# Altium PCB Infrared reception V2.0.PcbDoc
Units mil, origin at the board's own origin, x right, y up, seen from the top; angles counter-clockwise.
Board outline 2394.23 x 2394.23 mil, 2 copper layers (Top Layer, Bottom Layer); 49 components, 31 nets, 124 pads, 33 vias.
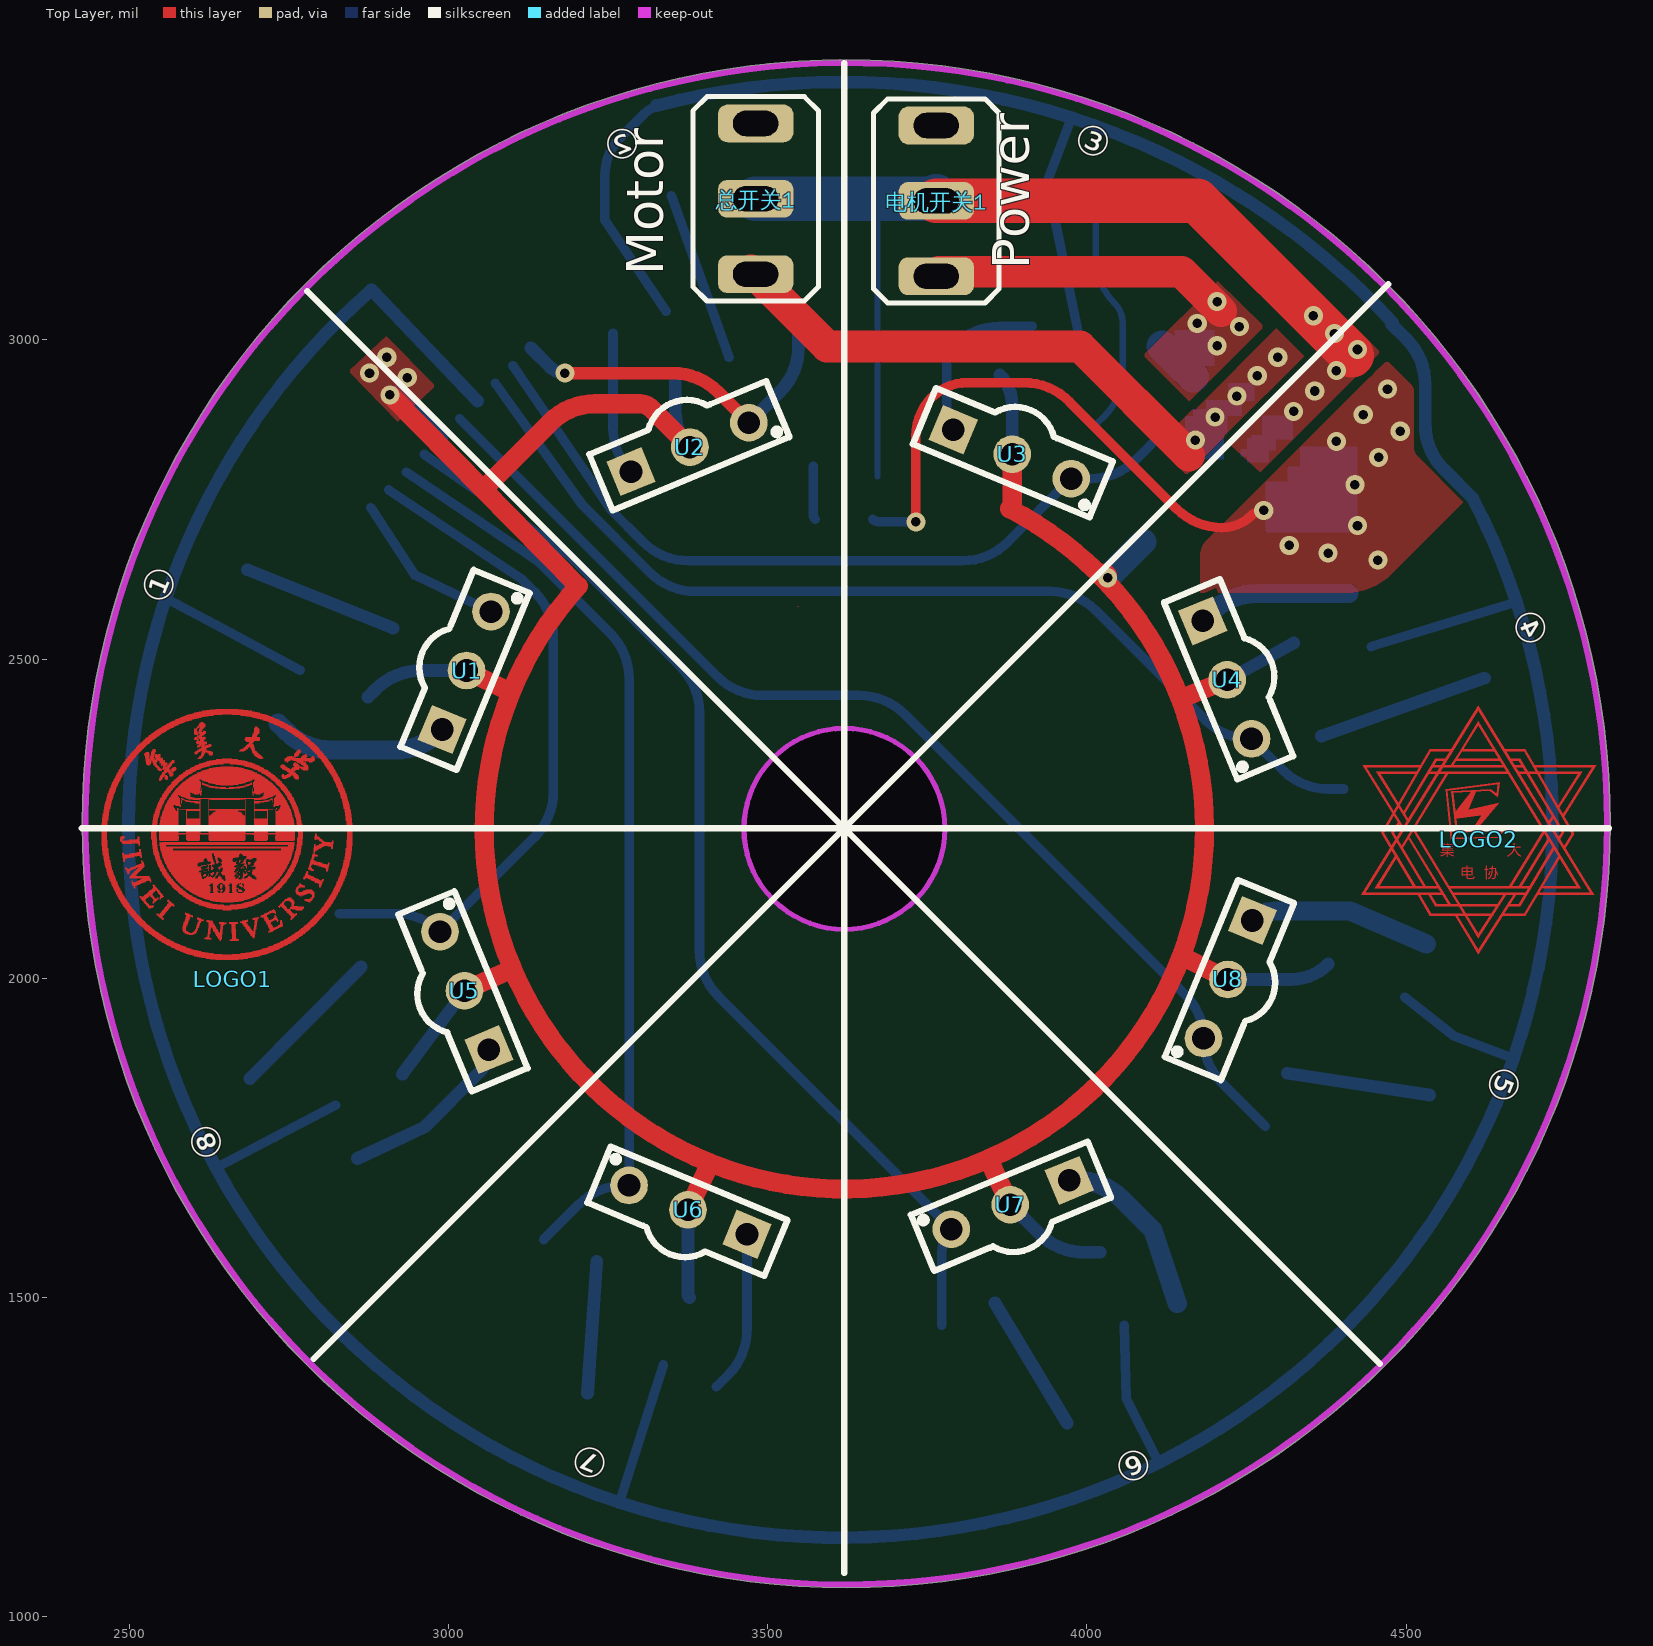
[diagram p0: Top Layer view]
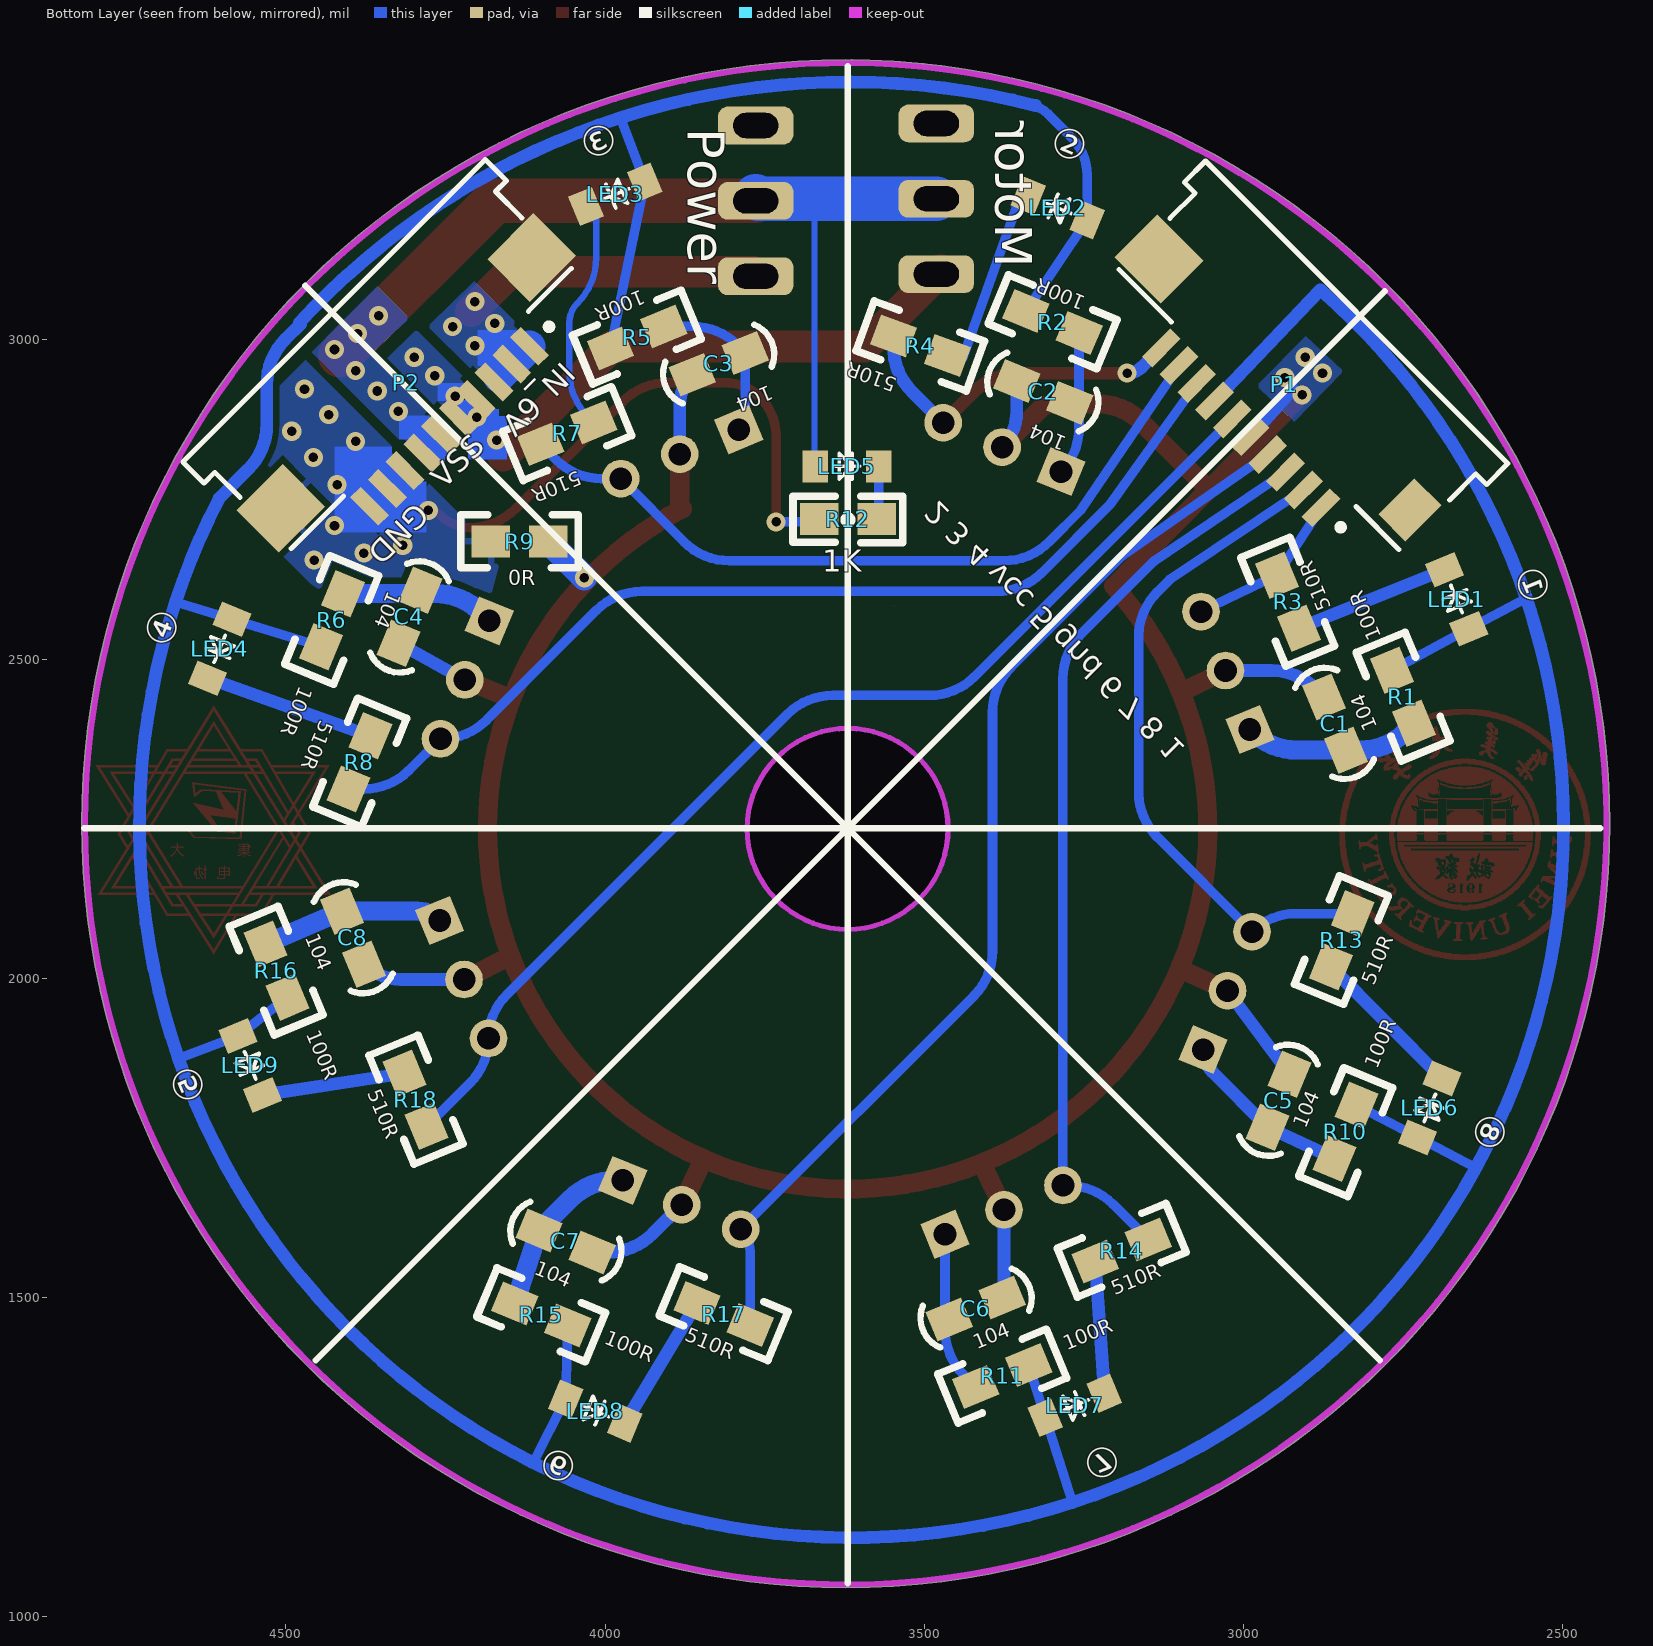
[diagram p1: Bottom Layer view, seen from below]
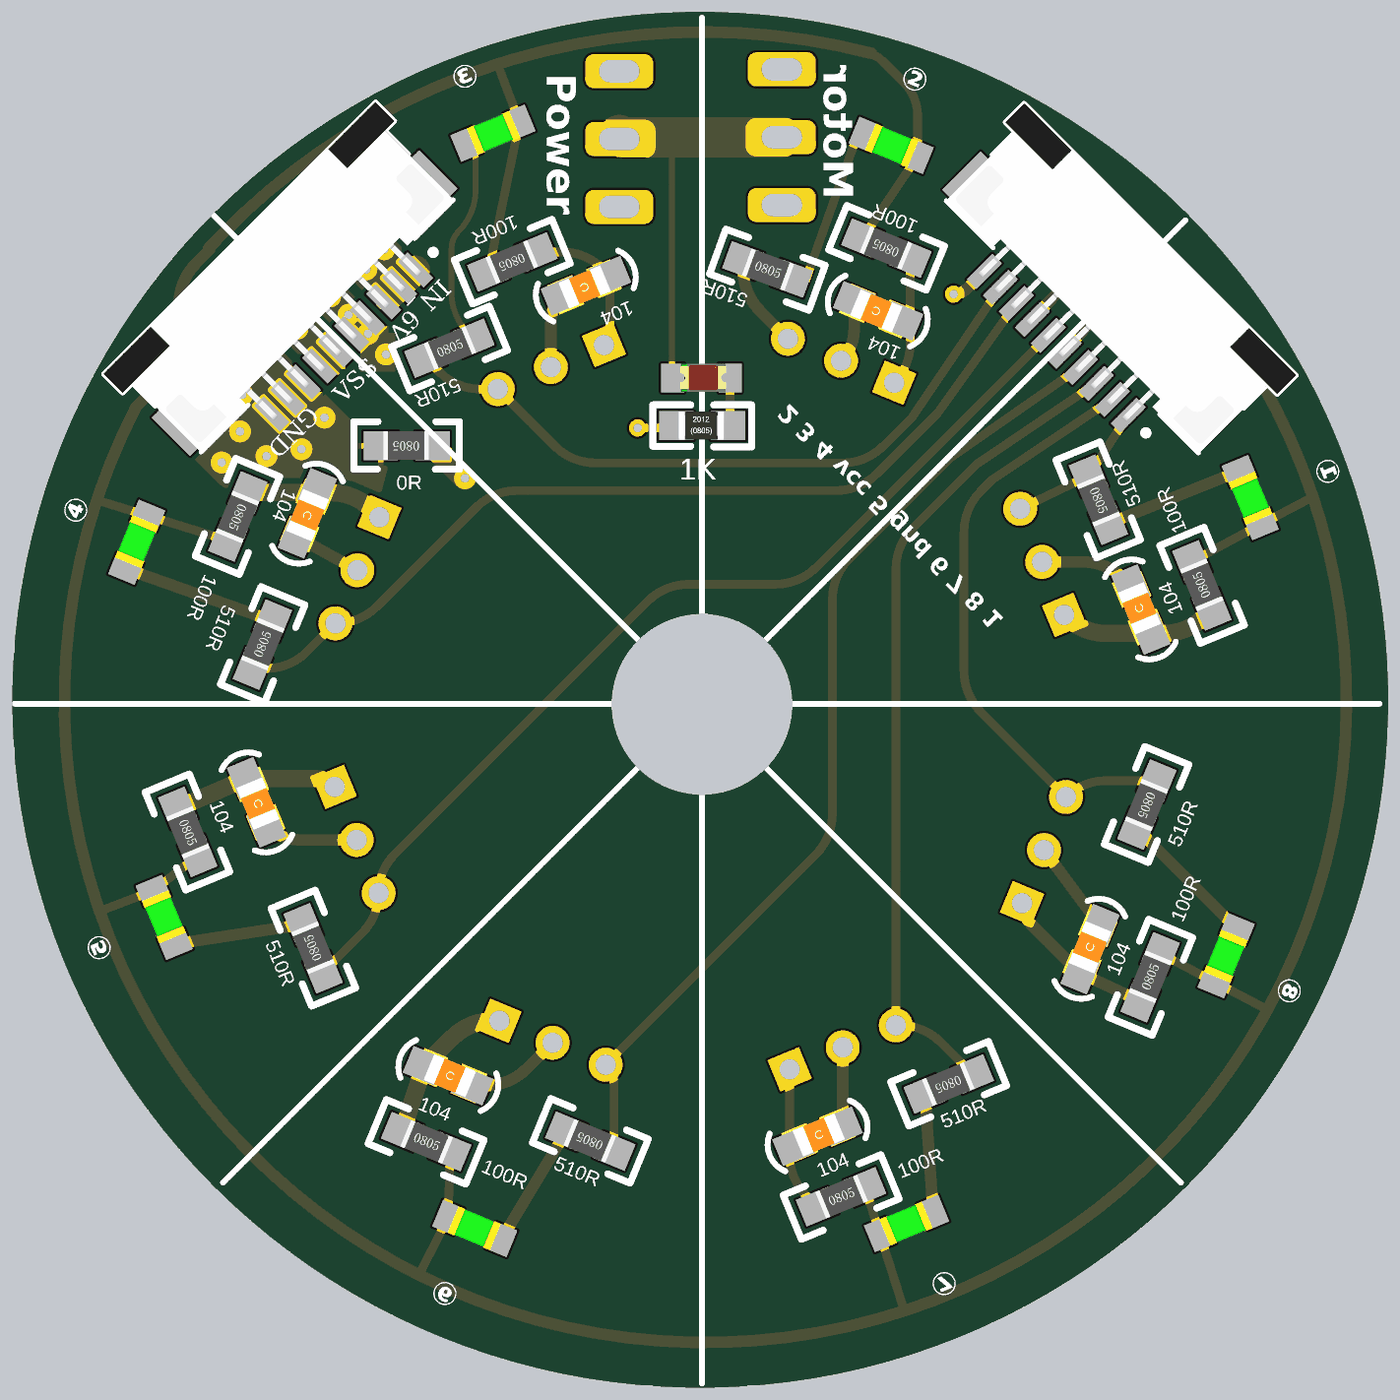
[diagram p2: 3D render of the assembled board from below, using the file's embedded part models]

## Layer stack, top to bottom
Top Solder: solder mask 0.4, Solder Resist, Dk 3.5
Top Layer: signal copper 1.4
Dielectric 1: dielectric 12.6, FR-4, Dk 4.8
Bottom Layer: signal copper 1.4
Bottom Solder: solder mask 0.4, Solder Resist, Dk 3.5

## Board outline
2425.89,2242 ccw(c3623,2242) 3623,1044.89 ccw(c3623,2242) 4820.11,2242 ccw(c3623,2242) 3623,3439.11 ccw(c3623,2242)
cut-out: 3462.52,2234 ccw(c3620,2234) 3620,2076.52 ccw(c3620,2234) 3777.48,2234 ccw(c3620,2234) 3620,2391.48 ccw(c3620,2234)

## Design rules (kind name [scope] priority, off if disabled: settings)
Clearance [All] p1: gap=10
DiffPairsRouting [All] p1: maxlimit=10 minlimit=10 mostfreqgap=10 toplayer_minwidth=0 toplayer_maxwidth=15 toplayer_prefwidth=15 bottomlayer_minwidth=15 bottomlayer_maxwidth=15 bottomlayer_prefwidth=15 maxuncoupledlength=500
PolygonConnect [All] p1: connectstyle=Relief reliefconductorwidth=10 reliefentries=4 polygonreliefangle="90 Angle" airgapwidth=10
RoutingVias [All] p1: holewidth=28 width=50 viastyle="Through Hole" minholewidth=28 minwidth=50 maxholewidth=28 maxwidth=50
SolderMaskExpansion [All] p1: expansion=4
Width [All] p1: maxlimit=100 minlimit=10 preferedwidth=10 minimp=50.000000 maximp=50.000000 favimp=50.000000
29 further rules are at their usual default settings.

## Components (designator, comment, footprint, x,y, rotation, side; value= is the part's Value field where it differs from the comment)
C1 "104" 0805C 2841,2362 r67.5 bottom
C2 "104" 0805C 3276.47,2903.47 r22.5 bottom
C3 "104" 0805C 3785,2978 r337.5 bottom
C4 "104" 0805C 4291.47,2603.53 r292.5 bottom
C5 "104" 0805C 2960,1771 r112.5 bottom
C6 "104" 0805C 3456,1467 r157.5 bottom
C7 "104" 0805C 4099,1603 r202.5 bottom
C8 "104" 0805C 4410.53,2100.53 r247.5 bottom
LED1 "LED" 0805LED 2649.34,2548.69 r67.5 bottom
LED2 "LED" 0805LED 3247.23,3186.65 r22.5 bottom
LED3 "LED" 0805LED 3938.69,3244.66 r337.5 bottom
LED4 "LED" 0805LED 4583.65,2559.78 r292.5 bottom
LED5 "LED2" LED(0805) 3621,2802 r180 bottom
LED6 "LED" 0805LED 2728,1753 r112.5 bottom
LED7 "LED" 0805LED 3309,1314 r157.5 bottom
LED8 "LED" 0805LED 4059,1342 r202.5 bottom
LED9 "LED" 0805LED 4572.66,1908.31 r247.5 bottom
LOGO1 "JMU_LOGO" JMU_logo（1） 2662,1998 r0 top
LOGO2 "电协LOGO" 电协LOGO 4614,2216.9 r0 top
P1 "FPC-10" FPC-10#1 2958.17,2907.64 r45 bottom
P2 "FPC-10" FPC-10#2 4289,2910 r315 bottom
R1 "100R" 0805R#1 2750,2441 r67.5 bottom
R2 "100R" 0805R#1 3299,3028 r22.5 bottom
R3 "510R" 0805R#1 2930,2590 r247.5 bottom
R4 "510R" 0805R#1 3506,2991 r200 bottom
R5 "100R" 0805R#1 3950,3004 r337.5 bottom
R6 "100R" 0805R#1 4428,2561 r292.5 bottom
R7 "510R" 0805R#1 4059.57,2853.78 r157.5 bottom
R8 "510R" 0805R#1 4385,2338 r112.5 bottom
R9 "0R" 0805R#1 4134,2684 r0 bottom
R10 "100R" 0805R#1 2840,1759 r112.5 bottom
R11 "100R" 0805R#1 3378,1377 r157.5 bottom
R12 "1K" 0805R#2 3660,2718 r180 bottom
R13 "510R" 0805R#1 2845.78,2059.57 r292.5 bottom
R14 "510R" 0805R#1 3190.43,1573.22 r337.5 bottom
R15 "100R" 0805R#1 4100,1473 r202.5 bottom
R16 "100R" 0805R#1 4515,2012 r247.5 bottom
R17 "510R" 0805R#1 3814.43,1473.78 r22.5 bottom
R18 "510R" 0805R#1 4296.78,1809.43 r67.5 bottom
U1 "HS0038/VS1838" HS0038 3028,2482 r67.5 top
U2 "HS0038/VS1838" HS0038 3378,2832 r22.5 top
U3 "HS0038/VS1838" HS0038 3883,2821 r337.5 top
U4 "HS0038/VS1838" HS0038 4219.73,2467.39 r292.5 top
U5 "HS0038/VS1838" HS0038 3024.73,1980.39 r112.5 top
U6 "HS0038/VS1838" HS0038 3375,1637 r157.5 top
U7 "HS0038/VS1838" HS0038 3880,1645 r202.5 top
U8 "HS0038/VS1838" HS0038 4221,1998 r247.5 top
总开关1 "Header 3" 钮子开关(小) 3481,3221.11 r90 top
电机开关1 "Header 3" 钮子开关(小) 3764,3217.89 r90 top

## Footprints (in the part's own frame and the unit in brackets; to place one, negate y for a bottom-side part, rotate by r counter-clockwise, add the part's x,y. Pads: shape width x height; smd on the part's side, far side on the other; paste and mask are expansions set on the pad)
0805C [mil]
  rect 60x50 smd: 1(-5,0) 2(85,0)
  silkscreen extent -50,-35 131,36, body extent -16,-26 102,29, height 37
0805LED [mil]
  rect 40x50 smd: 1(-2,-2) 2(98,-2)
  silkscreen extent 25,-22 71,18, body extent 7,-27 87,23, height 43
0805R#1 [mil]
  rect 60x50 smd: 1(-45,0) 2(45,0)
  silkscreen extent -92,-42 92,41, body extent -38,-25 40,25, height 22
0805R#2 [mil]
  rect 60x50 smd: 1(-4.51,1.2) 2(85.49,1.2)
  silkscreen extent -46,-36 126,37, body extent -1,-23 78,26, height 18
FPC-10#1 [mm]
  rect 1.524x2.032 smd: 0(-7.061,-0.813)
  rect 2.6x2.4 smd: 0(7.061,-0.813)
  rect 0.6x1.6 smd: 1(-4.5,1.625) 2(-3.5,1.625) 3(-2.5,1.625) 4(-1.5,1.625) 5(-0.5,1.625) 6(0.5,1.625) 7(1.5,1.625) 8(2.5,1.625) 9(3.5,1.625) 10(4.5,1.625)
  silkscreen extent -8.51,-4.88 8.51,1.75, body extent -8.5,-4.89 8.5,1.91, height 2.8
FPC-10#2 [mm]
  rect 2.6x2.4 smd: 0(-7.061,-0.813) 0(7.061,-0.813)
  rect 0.6x1.6 smd: 1(-4.5,1.625) 2(-3.5,1.625) 3(-2.5,1.625) 4(-1.5,1.625) 5(-0.5,1.625) 6(0.5,1.625) 7(1.5,1.625) 8(2.5,1.625) 9(3.5,1.625) 10(4.5,1.625)
  silkscreen extent -8.51,-4.88 8.51,1.75, body extent -8.5,-4.89 8.5,1.91, height 2.8
HS0038 [mm]
  round 1.5 hole 0.9: 1(2.54,0) 2(0,0)
  rect 1.5x1.5 hole 0.9: 3(-2.54,0)
  silkscreen extent -3.81,-1.14 3.81,1.9
JMU_logo（1） [mil]
  Top Layer region: 8.21,175.64 7.21,175.64 7.21,176.64 8.21,176.64
  Top Layer region: 27.21,181.64 26.21,181.64 26.21,180.64 24.21,180.64 24.21,183.64 27.21,183.64
  Top Layer region: -42.79,162.64 -43.79,162.64 -43.79,161.64 -46.79,161.64 -46.79,163.64 -44.79,163.64 -44.79,164.64 -42.79,164.64
  Top Layer region: -32.79,175.64 -31.79,175.64 -31.79,174.64 -30.79,174.64 -30.79,173.64 -31.79,173.64 -31.79,172.64 -32.79,172.64 -32.79,171.64 -33.79,171.64 -33.79,176.64 -32.79,176.64
  Top Layer region: -29.79,165.64 -30.79,165.64 -30.79,164.64 -31.79,164.64 -31.79,163.64 -33.79,163.64 -33.79,164.64 -34.79,164.64 -34.79,166.64 -31.79,166.64 -31.79,167.64 -29.79,167.64
  Top Layer region: -103.79,318.64 -101.79,318.64 -101.79,313.64 -102.79,313.64 -102.79,312.64 -104.79,312.64 -104.79,313.64 -105.79,313.64 -105.79,314.64 -106.79,314.64 -106.79,319.64 -103.79,319.64
  Top Layer region: -89.79,330.64 -88.79,330.64 -88.79,329.64 -89.79,329.64 -89.79,327.64 -90.79,327.64 -90.79,326.64 -92.79,326.64 -92.79,325.64 -93.79,325.64 -93.79,324.64 -95.79,324.64 -95.79,325.64 -94.79,325.64 -94.79,327.64 -95.79,327.64 -95.79,326.64 -97.79,326.64 -97.79,328.64 -96.79,328.64 -96.79,329.64 -95.79,329.64 -95.79,330.64 -94.79,330.64 -94.79,331.64 -92.79,331.64 -92.79,332.64 -89.79,332.64
  Top Layer region: -40.79,358.64 -37.79,358.64 -37.79,357.64 -34.79,357.64 -34.79,356.64 -32.79,356.64 -32.79,355.64 -31.79,355.64 -31.79,352.64 -32.79,352.64 -32.79,351.64 -36.79,351.64 -36.79,352.64 -37.79,352.64 -37.79,354.64 -39.79,354.64 -39.79,355.64 -41.79,355.64 -41.79,356.64 -42.79,356.64 -42.79,358.64 -41.79,358.64 -41.79,359.64 -40.79,359.64
  Top Layer region: 105.21,357.64 106.21,357.64 106.21,355.64 105.21,355.64 105.21,354.64 104.21,354.64 104.21,353.64 103.21,353.64 103.21,351.64 102.21,351.64 102.21,350.64 101.21,350.64 101.21,349.64 99.21,349.64 99.21,348.64 97.21,348.64 97.21,349.64 96.21,349.64 96.21,352.64 97.21,352.64 97.21,354.64 98.21,354.64 98.21,355.64 99.21,355.64 99.21,356.64 100.21,356.64 100.21,357.64 101.21,357.64 101.21,359.64 105.21,359.64
  Top Layer region: 7.21,87.64 4.21,87.64 4.21,86.64 3.21,86.64 3.21,78.64 4.21,78.64 4.21,64.64 5.21,64.64 5.21,62.64 9.21,62.64 9.21,61.64 8.21,61.64 8.21,60.64 -4.79,60.64 -4.79,61.64 -3.79,61.64 -3.79,62.64 -0.79,62.64 -0.79,72.64 -1.79,72.64 -1.79,86.64 -3.79,86.64 -3.79,87.64 -5.79,87.64 -5.79,89.64 7.21,89.64
  Top Layer region: -100.79,123.64 -99.79,123.64 -99.79,122.64 -98.79,122.64 -98.79,121.64 -97.79,121.64 -97.79,120.64 -96.79,120.64 -96.79,119.64 -94.79,119.64 -94.79,118.64 -93.79,118.64 -93.79,117.64 -92.79,117.64 -92.79,116.64 -91.79,116.64 -91.79,114.64 -93.79,114.64 -93.79,115.64 -96.79,115.64 -96.79,114.64 -97.79,114.64 -97.79,113.64 -98.79,113.64 -98.79,112.64 -99.79,112.64 -99.79,111.64 -100.79,111.64 -100.79,109.64 -101.79,109.64 -101.79,108.64 -102.79,108.64 -102.79,107.64 -103.79,107.64 -103.79,106.64 -104.79,106.64 -104.79,105.64 -105.79,105.64 -105.79,103.64 -106.79,103.64 -106.79,102.64 -107.79,102.64 -107.79,101.64 -108.79,101.64 -108.79,100.64 -109.79,100.64 -109.79,98.64 -110.79,98.64 -110.79,96.64 -109.79,96.64 -109.79,95.64 -108.79,95.64 -108.79,94.64 -109.79,94.64 -109.79,93.64 -110.79,93.64 -110.79,94.64 -111.79,94.64 -111.79,95.64 -112.79,95.64 -112.79,96.64 -113.79,96.64 -113.79,97.64 -115.79,97.64 -115.79,98.64 -116.79,98.64 -116.79,99.64 -117.79,99.64 -117.79,100.64 -118.79,100.64 -118.79,101.64 -119.79,101.64 -119.79,102.64 -116.79,102.64 -116.79,101.64 -114.79,101.64 -114.79,102.64 -113.79,102.64 -113.79,103.64 -112.79,103.64 -112.79,104.64 -111.79,104.64 -111.79,106.64 -110.79,106.64 -110.79,107.64 -109.79,107.64 -109.79,108.64 -108.79,108.64 -108.79,109.64 -107.79,109.64 -107.79,111.64 -106.79,111.64 -106.79,112.64 -105.79,112.64 -105.79,113.64 -104.79,113.64 -104.79,114.64 -103.79,114.64 -103.79,115.64 -102.79,115.64 -102.79,117.64 -101.79,117.64 -101.79,118.64 -100.79,118.64 -100.79,121.64 -101.79,121.64 -101.79,122.64 -102.79,122.64 -102.79,123.64 -101.79,123.64 -101.79,124.64 -100.79,124.64
  Top Layer region: -144.79,199.64 -143.79,199.64 -143.79,194.64 -142.79,194.64 -142.79,190.64 -144.79,190.64 -144.79,192.64 -145.79,192.64 -145.79,193.64 -150.79,193.64 -150.79,192.64 -155.79,192.64 -155.79,191.64 -160.79,191.64 -160.79,190.64 -165.79,190.64 -165.79,189.64 -168.79,189.64 -168.79,188.64 -169.79,188.64 -169.79,184.64 -170.79,184.64 -170.79,185.64 -171.79,185.64 -171.79,190.64 -172.79,190.64 -172.79,195.64 -173.79,195.64 -173.79,197.64 -172.79,197.64 -172.79,198.64 -171.79,198.64 -171.79,196.64 -170.79,196.64 -170.79,195.64 -169.79,195.64 -169.79,194.64 -168.79,194.64 -168.79,195.64 -162.79,195.64 -162.79,196.64 -158.79,196.64 -158.79,197.64 -152.79,197.64 -152.79,198.64 -148.79,198.64 -148.79,199.64 -146.79,199.64 -146.79,203.64 -144.79,203.64
  Top Layer region: 117.21,168.64 118.21,168.64 118.21,167.64 117.21,167.64 117.21,164.64 118.21,164.64 118.21,163.64 120.21,163.64 120.21,162.64 122.21,162.64 122.21,161.64 124.21,161.64 124.21,160.64 126.21,160.64 126.21,159.64 128.21,159.64 128.21,158.64 130.21,158.64 130.21,157.64 132.21,157.64 132.21,156.64 134.21,156.64 134.21,155.64 136.21,155.64 136.21,154.64 139.21,154.64 139.21,155.64 140.21,155.64 140.21,156.64 142.21,156.64 142.21,155.64 141.21,155.64 141.21,153.64 140.21,153.64 140.21,150.64 139.21,150.64 139.21,148.64 138.21,148.64 138.21,146.64 137.21,146.64 137.21,144.64 135.21,144.64 135.21,149.64 134.21,149.64 134.21,150.64 132.21,150.64 132.21,151.64 129.21,151.64 129.21,152.64 128.21,152.64 128.21,153.64 126.21,153.64 126.21,154.64 124.21,154.64 124.21,155.64 122.21,155.64 122.21,156.64 120.21,156.64 120.21,157.64 118.21,157.64 118.21,158.64 116.21,158.64 116.21,159.64 114.21,159.64 114.21,158.64 113.21,158.64 113.21,157.64 112.21,157.64 112.21,156.64 111.21,156.64 111.21,157.64 110.21,157.64 110.21,158.64 111.21,158.64 111.21,160.64 112.21,160.64 112.21,162.64 113.21,162.64 113.21,164.64 114.21,164.64 114.21,166.64 115.21,166.64 115.21,168.64 116.21,168.64 116.21,169.64 117.21,169.64
  Top Layer region: -170.79,223.64 -169.79,223.64 -169.79,221.64 -170.79,221.64 -170.79,220.64 -171.79,220.64 -171.79,219.64 -173.79,219.64 -173.79,217.64 -162.79,217.64 -162.79,218.64 -150.79,218.64 -150.79,219.64 -148.79,219.64 -148.79,223.64 -146.79,223.64 -146.79,216.64 -145.79,216.64 -145.79,210.64 -146.79,210.64 -146.79,209.64 -147.79,209.64 -147.79,212.64 -148.79,212.64 -148.79,213.64 -158.79,213.64 -158.79,212.64 -172.79,212.64 -172.79,213.64 -173.79,213.64 -173.79,214.64 -174.79,214.64 -174.79,215.64 -175.79,215.64 -175.79,217.64 -176.79,217.64 -176.79,221.64 -175.79,221.64 -175.79,223.64 -174.79,223.64 -174.79,224.64 -170.79,224.64
  Top Layer region: 128.21,195.64 131.21,195.64 131.21,194.64 133.21,194.64 133.21,192.64 127.21,192.64 127.21,190.64 126.21,190.64 126.21,188.64 125.21,188.64 125.21,186.64 126.21,186.64 126.21,185.64 129.21,185.64 129.21,184.64 132.21,184.64 132.21,183.64 136.21,183.64 136.21,182.64 139.21,182.64 139.21,181.64 142.21,181.64 142.21,180.64 145.21,180.64 145.21,179.64 148.21,179.64 148.21,180.64 149.21,180.64 149.21,182.64 151.21,182.64 151.21,179.64 150.21,179.64 150.21,176.64 149.21,176.64 149.21,172.64 148.21,172.64 148.21,169.64 146.21,169.64 146.21,173.64 145.21,173.64 145.21,174.64 143.21,174.64 143.21,175.64 140.21,175.64 140.21,176.64 137.21,176.64 137.21,177.64 134.21,177.64 134.21,178.64 130.21,178.64 130.21,179.64 127.21,179.64 127.21,180.64 124.21,180.64 124.21,181.64 123.21,181.64 123.21,178.64 122.21,178.64 122.21,174.64 123.21,174.64 123.21,172.64 125.21,172.64 125.21,171.64 126.21,171.64 126.21,170.64 122.21,170.64 122.21,171.64 119.21,171.64 119.21,172.64 118.21,172.64 118.21,174.64 119.21,174.64 119.21,178.64 120.21,178.64 120.21,181.64 121.21,181.64 121.21,184.64 122.21,184.64 122.21,187.64 123.21,187.64 123.21,190.64 124.21,190.64 124.21,194.64 125.21,194.64 125.21,196.64 128.21,196.64
  Top Layer region: 40.21,95.64 39.21,95.64 39.21,94.64 38.21,94.64 38.21,90.64 37.21,90.64 37.21,84.64 36.21,84.64 36.21,78.64 35.21,78.64 35.21,73.64 34.21,73.64 34.21,72.64 35.21,72.64 35.21,71.64 34.21,71.64 34.21,66.64 33.21,66.64 33.21,64.64 32.21,64.64 32.21,65.64 31.21,65.64 31.21,66.64 30.21,66.64 30.21,67.64 29.21,67.64 29.21,68.64 28.21,68.64 28.21,70.64 27.21,70.64 27.21,71.64 26.21,71.64 26.21,72.64 25.21,72.64 25.21,74.64 24.21,74.64 24.21,75.64 23.21,75.64 23.21,76.64 22.21,76.64 22.21,78.64 21.21,78.64 21.21,79.64 20.21,79.64 20.21,81.64 19.21,81.64 19.21,82.64 18.21,82.64 18.21,83.64 17.21,83.64 17.21,85.64 16.21,85.64 16.21,86.64 15.21,86.64 15.21,87.64 14.21,87.64 14.21,88.64 11.21,88.64 11.21,90.64 14.21,90.64 14.21,91.64 18.21,91.64 18.21,92.64 22.21,92.64 22.21,93.64 23.21,93.64 23.21,90.64 20.21,90.64 20.21,89.64 21.21,89.64 21.21,87.64 22.21,87.64 22.21,85.64 23.21,85.64 23.21,84.64 24.21,84.64 24.21,83.64 25.21,83.64 25.21,81.64 26.21,81.64 26.21,80.64 27.21,80.64 27.21,79.64 28.21,79.64 28.21,77.64 29.21,77.64 29.21,76.64 30.21,76.64 30.21,75.64 31.21,75.64 31.21,74.64 32.21,74.64 32.21,79.64 33.21,79.64 33.21,84.64 34.21,84.64 34.21,91.64 35.21,91.64 35.21,93.64 31.21,93.64 31.21,95.64 34.21,95.64 34.21,96.64 39.21,96.64 39.21,97.64 40.21,97.64
  Top Layer region: 106.21,148.64 108.21,148.64 108.21,147.64 110.21,147.64 110.21,146.64 112.21,146.64 112.21,144.64 104.21,144.64 104.21,143.64 103.21,143.64 103.21,142.64 102.21,142.64 102.21,141.64 101.21,141.64 101.21,138.64 102.21,138.64 102.21,137.64 103.21,137.64 103.21,136.64 108.21,136.64 108.21,137.64 110.21,137.64 110.21,138.64 112.21,138.64 112.21,139.64 115.21,139.64 115.21,140.64 123.21,140.64 123.21,139.64 124.21,139.64 124.21,138.64 125.21,138.64 125.21,137.64 126.21,137.64 126.21,136.64 127.21,136.64 127.21,128.64 126.21,128.64 126.21,127.64 125.21,127.64 125.21,125.64 124.21,125.64 124.21,124.64 123.21,124.64 123.21,123.64 121.21,123.64 121.21,120.64 119.21,120.64 119.21,121.64 117.21,121.64 117.21,122.64 115.21,122.64 115.21,123.64 112.21,123.64 112.21,125.64 120.21,125.64 120.21,126.64 122.21,126.64 122.21,127.64 123.21,127.64 123.21,128.64 124.21,128.64 124.21,132.64 123.21,132.64 123.21,134.64 120.21,134.64 120.21,135.64 118.21,135.64 118.21,134.64 115.21,134.64 115.21,133.64 113.21,133.64 113.21,132.64 111.21,132.64 111.21,131.64 107.21,131.64 107.21,130.64 105.21,130.64 105.21,131.64 102.21,131.64 102.21,132.64 101.21,132.64 101.21,133.64 100.21,133.64 100.21,134.64 99.21,134.64 99.21,136.64 98.21,136.64 98.21,140.64 99.21,140.64 99.21,142.64 100.21,142.64 100.21,144.64 101.21,144.64 101.21,145.64 102.21,145.64 102.21,146.64 104.21,146.64 104.21,149.64 106.21,149.64
  Top Layer region: 130.21,227.64 131.21,227.64 131.21,224.64 132.21,224.64 132.21,223.64 134.21,223.64 134.21,222.64 135.21,222.64 135.21,221.64 136.21,221.64 136.21,220.64 137.21,220.64 137.21,219.64 139.21,219.64 139.21,218.64 140.21,218.64 140.21,217.64 141.21,217.64 141.21,216.64 142.21,216.64 142.21,215.64 144.21,215.64 144.21,214.64 152.21,214.64 152.21,213.64 154.21,213.64 154.21,214.64 155.21,214.64 155.21,217.64 157.21,217.64 157.21,212.64 156.21,212.64 156.21,204.64 154.21,204.64 154.21,207.64 153.21,207.64 153.21,208.64 148.21,208.64 148.21,209.64 143.21,209.64 143.21,208.64 141.21,208.64 141.21,207.64 139.21,207.64 139.21,206.64 137.21,206.64 137.21,205.64 135.21,205.64 135.21,204.64 134.21,204.64 134.21,203.64 132.21,203.64 132.21,202.64 130.21,202.64 130.21,201.64 129.21,201.64 129.21,200.64 128.21,200.64 128.21,198.64 126.21,198.64 126.21,206.64 127.21,206.64 127.21,211.64 129.21,211.64 129.21,208.64 131.21,208.64 131.21,209.64 133.21,209.64 133.21,210.64 135.21,210.64 135.21,211.64 137.21,211.64 137.21,212.64 139.21,212.64 139.21,213.64 140.21,213.64 140.21,214.64 139.21,214.64 139.21,215.64 138.21,215.64 138.21,216.64 136.21,216.64 136.21,217.64 135.21,217.64 135.21,218.64 134.21,218.64 134.21,219.64 132.21,219.64 132.21,220.64 130.21,220.64 130.21,218.64 128.21,218.64 128.21,224.64 129.21,224.64 129.21,228.64 130.21,228.64
  Top Layer region: -73.79,103.64 -71.79,103.64 -71.79,102.64 -68.79,102.64 -68.79,101.64 -66.79,101.64 -66.79,100.64 -63.79,100.64 -63.79,99.64 -62.79,99.64 -62.79,97.64 -64.79,97.64 -64.79,98.64 -66.79,98.64 -66.79,97.64 -67.79,97.64 -67.79,95.64 -68.79,95.64 -68.79,92.64 -69.79,92.64 -69.79,89.64 -70.79,89.64 -70.79,87.64 -71.79,87.64 -71.79,84.64 -72.79,84.64 -72.79,81.64 -73.79,81.64 -73.79,76.64 -72.79,76.64 -72.79,75.64 -71.79,75.64 -71.79,74.64 -70.79,74.64 -70.79,73.64 -68.79,73.64 -68.79,72.64 -62.79,72.64 -62.79,73.64 -61.79,73.64 -61.79,74.64 -60.79,74.64 -60.79,75.64 -59.79,75.64 -59.79,76.64 -58.79,76.64 -58.79,78.64 -57.79,78.64 -57.79,81.64 -56.79,81.64 -56.79,84.64 -55.79,84.64 -55.79,86.64 -54.79,86.64 -54.79,89.64 -53.79,89.64 -53.79,93.64 -54.79,93.64 -54.79,94.64 -55.79,94.64 -55.79,96.64 -53.79,96.64 -53.79,95.64 -50.79,95.64 -50.79,94.64 -48.79,94.64 -48.79,93.64 -45.79,93.64 -45.79,91.64 -49.79,91.64 -49.79,90.64 -50.79,90.64 -50.79,88.64 -51.79,88.64 -51.79,86.64 -52.79,86.64 -52.79,83.64 -53.79,83.64 -53.79,80.64 -54.79,80.64 -54.79,78.64 -55.79,78.64 -55.79,76.64 -56.79,76.64 -56.79,74.64 -57.79,74.64 -57.79,72.64 -59.79,72.64 -59.79,71.64 -60.79,71.64 -60.79,70.64 -62.79,70.64 -62.79,69.64 -68.79,69.64 -68.79,70.64 -71.79,70.64 -71.79,71.64 -73.79,71.64 -73.79,72.64 -75.79,72.64 -75.79,73.64 -76.79,73.64 -76.79,74.64 -77.79,74.64 -77.79,76.64 -78.79,76.64 -78.79,83.64 -77.79,83.64 -77.79,86.64 -76.79,86.64 -76.79,89.64 -75.79,89.64 -75.79,91.64 -74.79,91.64 -74.79,94.64 -73.79,94.64 -73.79,97.64 -72.79,97.64 -72.79,101.64 -74.79,101.64 -74.79,104.64 -73.79,104.64
  Top Layer region: 215 vertices and 0 holes, not listed, extent -145.79,111.64 -108.79,148.64
  Top Layer region: 177 vertices and 0 holes, not listed, extent 43.21,73.64 78.21,109.64
  Top Layer region: -37.79,91.64 -32.79,91.64 -32.79,90.64 -31.79,90.64 -31.79,88.64 -30.79,88.64 -30.79,86.64 -29.79,86.64 -29.79,85.64 -28.79,85.64 -28.79,83.64 -27.79,83.64 -27.79,82.64 -26.79,82.64 -26.79,80.64 -25.79,80.64 -25.79,78.64 -24.79,78.64 -24.79,77.64 -23.79,77.64 -23.79,75.64 -22.79,75.64 -22.79,73.64 -21.79,73.64 -21.79,72.64 -20.79,72.64 -20.79,70.64 -19.79,70.64 -19.79,78.64 -18.79,78.64 -18.79,87.64 -21.79,87.64 -21.79,89.64 -14.79,89.64 -14.79,88.64 -10.79,88.64 -10.79,87.64 -11.79,87.64 -11.79,86.64 -14.79,86.64 -14.79,84.64 -15.79,84.64 -15.79,78.64 -16.79,78.64 -16.79,70.64 -17.79,70.64 -17.79,62.64 -18.79,62.64 -18.79,60.64 -20.79,60.64 -20.79,62.64 -21.79,62.64 -21.79,63.64 -22.79,63.64 -22.79,65.64 -23.79,65.64 -23.79,66.64 -24.79,66.64 -24.79,68.64 -25.79,68.64 -25.79,70.64 -26.79,70.64 -26.79,71.64 -27.79,71.64 -27.79,73.64 -28.79,73.64 -28.79,74.64 -29.79,74.64 -29.79,76.64 -30.79,76.64 -30.79,78.64 -31.79,78.64 -31.79,80.64 -32.79,80.64 -32.79,81.64 -33.79,81.64 -33.79,83.64 -34.79,83.64 -34.79,79.64 -35.79,79.64 -35.79,71.64 -36.79,71.64 -36.79,64.64 -33.79,64.64 -33.79,62.64 -41.79,62.64 -41.79,63.64 -44.79,63.64 -44.79,64.64 -43.79,64.64 -43.79,65.64 -40.79,65.64 -40.79,66.64 -39.79,66.64 -39.79,71.64 -38.79,71.64 -38.79,79.64 -37.79,79.64 -37.79,86.64 -36.79,86.64 -36.79,87.64 -37.79,87.64 -37.79,89.64 -39.79,89.64 -39.79,90.64 -40.79,90.64 -40.79,92.64 -37.79,92.64
  Top Layer region: 139 vertices and 1 holes, not listed, extent 71.21,93.64 111.21,127.64
  Top Layer region: 195 vertices and 0 holes, not listed, extent -168.79,142.64 -127.79,185.64
  Top Layer region: 155 vertices and 0 holes, not listed, extent 10.21,345.64 47.21,395.64
  Top Layer region: 241 vertices and 4 holes, not listed, extent -60.79,345.64 -33.79,402.64
  Top Layer region: 219 vertices and 1 holes, not listed, extent -138.79,311.64 -91.79,360.64
  Top Layer region: 251 vertices and 0 holes, not listed, extent 75.21,313.64 128.21,352.64
  Top Layer region: 261 vertices and 22 holes, not listed, extent -114.79,120.64 96.21,214.64
  Top Layer region: 309 vertices and 19 holes, not listed, extent -115.79,217.64 97.21,333.64
  Top Layer region: 557 vertices and 1 holes, not listed, extent -127.79,108.64 109.21,345.64
  Top Layer region: 917 vertices and 1 holes, not listed, extent -205.79,30.64 187.21,423.64
LED(0805) [mil]
  rect 40x50 smd: 1(-50,0) 2(50,0)
  silkscreen extent -20,-20 20,20, body extent -37,-24 43,25, height 43
电协LOGO [mil]
  Top Layer region: 116.9,14.74 122.9,24.74 124.9,22.74 124.9,20.74 119.9,12.74 117.9,12.74
  Top Layer region: 108.9,27.74 114.9,37.74 116.9,35.74 116.9,33.74 111.9,25.74 109.9,25.74
  Top Layer region: 64.9,106.74 160.9,106.74 161.9,106.74 124.9,47.74 123.9,52.74 155.9,103.74 65.9,103.74
  Top Layer region: 86.9,116.74 182.9,116.74 183.9,116.74 133.9,36.74 131.4,39.24 177.9,113.74 87.9,113.74
  Top Layer region: -26.1,141.74 23.9,141.74 24.9,140.74 25.9,139.74 26.9,138.74 -28.1,138.74
  Top Layer region: 75.9,106.74 61.9,106.74 59.9,104.74 62.9,103.74 63.9,103.74 64.9,103.74 75.9,103.74
  Top Layer region: 68.9,116.74 54.9,116.74 52.9,114.74 56.9,114.74 57.9,113.74 68.9,113.74
  Top Layer region: -52.1,126.74 -68.1,126.74 -118.6,43.24 -116.1,40.74 -66.1,123.74 -54.1,123.74
  Top Layer region: -37.1,126.74 32.9,126.74 31.9,126.74 33.9,125.74 33.9,123.74 -39.1,123.74
  Top Layer region: -79.1,103.74 -77.1,106.74 43.9,106.74 45.9,103.74
  Top Layer region: -70.1,116.74 38.9,116.74 38.9,115.74 39.9,113.74 -72.1,113.74
  Top Layer region: 32.9,89.74 29.9,66.74 16.9,76.74 18.9,78.74 27.9,71.74 29.9,86.74 -49.1,76.74 -41.6,3.24 29.9,4.74 40.9,19.74 -35.1,9.74 -43.1,75.74 18.9,78.74 17.9,77.74 16.9,76.74 -40.1,73.74 -33.1,12.74 41.9,22.74 46.9,23.74 30.9,2.74 -44.1,0.74 -52.1,78.74
  Top Layer region: -110.86,2.35 -46.94,-102.76 -43.6,-102.76 -43.98,-101.19 -110.1,6.74
  Top Layer region: -102.86,14.35 -13.1,-133.26 -0.82,-154.09 43.9,-84.26 39.9,-84.26 -0.82,-147.26 -34.1,-92.26 -102.1,18.74
  Top Layer region: -37.1,-119.26 -13.1,-158.26 -0.82,-179.09 59.9,-84.26 55.9,-84.26 -0.82,-172.26 -34.1,-117.26 -37.1,-118.26
  Top Layer region: -74.6,-116.26 -32.6,-116.26 23.4,-116.26 22.4,-119.26 -76.6,-119.26 -96.6,-84.26 -92.6,-85.26
  Top Layer region: -125.1,25.74 -125.72,29.35 -137.1,10.74 -85.56,-75.17 -83.1,-73.26 -133.1,10.74 -122.8,26.44
  Top Layer region: 125.9,-23.26 70.9,-116.26 37.9,-116.26 35.9,-119.26 72.9,-119.26 127.9,-27.26
  Top Layer region: 116.76,-10.47 62.9,-101.26 47.9,-101.26 46.9,-104.26 64.9,-104.26 119.9,-12.26
  Top Layer region: 109.9,3.74 61.9,-74.26 65.9,-75.26 111.9,0.74
  Top Layer region: 101.9,15.74 46.9,-73.76 47.9,-75.26 51.9,-73.26 103.9,12.74
  Top Layer region: -51.1,104.74 -121.6,-10.76 -119.6,-13.76 -47.1,104.74
  Top Layer region: -95.6,106.74 -160.6,106.74 -112.1,28.74 -109.1,29.74 -154.6,103.74 -99.1,103.74
  Top Layer region: -91.1,116.74 -182.1,116.74 -119.1,15.74 -117.1,17.74 -176.1,113.74 -93.1,113.74
  Top Layer region: -43.1,141.74 -77.03,141.74 -153.1,10.74 -101.56,-75.17 -99.1,-73.26 -149.1,10.74 -75.1,138.74 -43.1,138.74
  Top Layer region: 39.9,141.74 72.9,141.74 149.9,9.74 134.9,-15.26 132.9,-11.26 145.9,9.74 70.9,138.74 39.9,138.74
  Top Layer region: -66.1,-101.26 -24.1,-101.26 31.9,-101.26 30.9,-104.26 -68.1,-104.26 -79.1,-85.26 -75.1,-86.26
  Top Layer region: -40.1,-83.26 29.9,-83.26 75.9,-83.26 74.9,-86.26 -40.1,-86.26
  Top Layer region: -46.1,-73.26 23.9,-73.26 79.9,-73.26 78.9,-76.26 -46.1,-76.26
  Top Layer region: 48.9,126.74 64.9,126.74 133.9,11.74 126.9,-0.26 124.9,3.74 129.9,11.74 62.9,123.74 50.9,123.74
  Top Layer region: -44.1,116.74 -30.1,137.74 -1.1,185.74 159.9,-76.26 98.9,-76.26 100.9,-73.26 153.9,-73.26 -1.1,179.74 -40.1,116.74
  Top Layer region: -1.1,209.74 -12.1,192.74 -184.1,-86.26 -176.1,-86.26 -57.1,-86.31 -55.1,-83.26 -61.75,-72.19 -65.1,-73.26 -156.1,-73.26 -129.1,-29.26 -131.1,-25.26 -163.1,-76.26 -63.1,-76.26 -58.6,-83.26 -178.1,-83.26 -1.1,202.74 52.9,114.74 174.9,-83.26 94.9,-83.26 92.9,-86.26 180.9,-86.26 170.9,-70.26
  Top Layer region: -12.1,75.24 -37.85,42.49 -36.1,32.74 4.9,38.74 -11.1,14.74 -5.1,14.74 31.9,57.74 -16.6,46.74 -3.6,76.74
钮子开关(小) [mm]
  rrect50% 1.5x3 hole 1 slot 1.8 at 90 deg: 1(-3,0) 2(0,0) 3(3,0)
  silkscreen extent -4.06,-2.5 4.06,2.5

## Part data
C1 C2 C3 C4 C5 C6 C7 C8: library part Cap1, "无极贴片电容"
LED1 LED2 LED3 LED4 LED6 LED7 LED8 LED9: "发光二极管"
LED5: library part LED, "发光二极管"
LOGO1: "LOGO"
P1 P2: "软排线底座"
R1 R2 R3 R4 R5 R6 R7 R8 R9 R10 R11 R12 R13 R14 R15 R16 R17 R18: library part Res, "电阻"
U1 U2 U3 U4 U5 U6 U7 U8: "一体化红外接收头"
总开关1 电机开关1: "排针"

## Via types
v1: diameter 30, hole 15, Top Layer to Bottom Layer, 33 vias

## Nets (pads, with @x,y where several pads share a name; then routed paths per layer and width w, separated by ;. In a path a pad name is that pad's centre, name@x,y a point inside that pad or via, vN(x,y) a via of type N, cw(c..) or ccw(c..) an arc to the next point about the centre after c; other vN are vias at no path point)
AGND: C1.2 C2.2 C3.2 C4.2 C5.2 C6.2 C7.2 C8.2 P1.5 R9.1 U1.2 U2.2 U3.2 U4.2 U5.2 U6.2 U7.2 U8.2 | length 5566.9
  Top Layer w30: v1(2908,2914) 3054,2765.77 ; U5.2 3099.96,2014.83 ; U1.2 3097.63,2447.56 ; U6.2 3409.72,1710.3 ; U2.2 3317.78,2892.22 ccw(c3299,2873.44) 3299,2900 3229.66,2900 ccw(c3229.66,2800) 3158.94,2870.71 3054,2765.77 ; U7.2 3845.67,1716.75 ; U3.2 3883,2735.47 3878.85,2735.47 cw(c3620,2234) 4017.54,2634.54 cw(c3620,2234) 4069.07,2575.77 cw(c3620,2234) 4146.41,2437.39 ; v1@4029,2635 4032.5,2631.5 v1(4032.5,2627.5) ; U4.2 4146.41,2437.39 ; U8.2 4148.07,2034.97 ; 3054,2765.77 3203.12,2614.37 ccw(c3620,2234) 3097.63,2447.56 ; 3097.63,2447.56 ccw(c3620,2234) 3099.96,2014.83 ; 3099.96,2014.83 ccw(c3620,2234) 3409.72,1710.3 ; 3409.72,1710.3 ccw(c3620,2234) 3845.67,1716.75 ; 3845.67,1716.75 ccw(c3620,2234) 4148.07,2034.97 ; 4146.41,2437.39 cw(c3620,2234) 4148.07,2034.97
  Bottom Layer w20: C1.2 2885.71,2452.71 cw(c2956.42,2382) 2956.42,2482 U1.2 ; 2922.76,2922.21 P1.5 ; C5.2 U5.2 ; C2.2 3355,2887.53 ccw(c3433.53,2887.53) U2.2 ; U6.2 3375,1505.49 ccw(c3383.43,1505.49) C6.2 ; C3.2 cw(c3816.52,2898.47) 3883,2898.47 U3.2 ; U7.2 3925.24,1599.76 ccw(c3995.95,1670.47) 3995.95,1570.47 C7.2 ; v1(4032.5,2627.5) 4029,2631 ccw(c4029,2647.9) v1@4040.95,2635.95 ; U4.2 C4.2 ; U8.2 4320.06,1998 ccw(c4320.06,2079.94) C8.2
  Bottom Layer w40: v1(4032.5,2627.5) R9.1
  other v1: 2935,2941 2876,2948 2903,2973
GND: P2.0@4508.2,2736.05 P2.8 P2.9 P2.10 R9.2 R12.1 | length 872.1
  Top Layer w15: v1(3732,2715) 3732,2849.64 cw(c3817.36,2849.64) 3757,2910 cw(c3812.53,2854.47) 3812.53,2933 3901.58,2933 cw(c3901.58,2833) 3972.29,2903.71 4140.71,2735.29 ccw(c4211.42,2806) 4211.42,2706 ccw(c4211.42,2772.58) 4258.5,2725.5 4261,2728
  Bottom Layer w15: R12.1 ccw(c3674.66,2729.36) 3674.66,2715 v1(3732,2715)
  other v1: 4456,2655 4378,2666 4317,2678 4424,2709 4277,2733 4420,2773 4457,2816 4391,2841 4491,2857 4433,2883 4471,2923
IN_6V: P2.1 P2.2 P2.3 电机开关1.1 | length 534.5
  Top Layer w50: 电机开关1.1@3768,3106.89 4148.11,3106.89 4210,3045
  Bottom Layer w50: P2.1 4146.47,2962.34 4166,2943
  other v1: 4204,2991 4239,3021 4173,3026 4204,3060
M_6V: P2.4 P2.5 总开关1.1 | length 806.1
  Top Layer w50: 总开关1.1@3474,3108.89 3592.89,2990 3989,2990 4160,2819
  other v1: 4170,2843 4201,2879 4235,2912 4267,2944 4299,2973
NetC1_1: C1.1 R1.1 U1.3 | length 279.1
  Bottom Layer w30: R1.1 2745.53,2386.67 ccw(c2816.25,2457.38) 2816.25,2357.38 C1.1 2916.08,2357.38 ccw(c2916.08,2457.38) 2986.79,2386.67 U1.3
NetC2_1: C2.1 R2.1 U2.3 | length 251
  Bottom Layer w15: R2.1 3257.43,2861.78 ccw(c3353.66,2861.78) U2.3 cw(c3285.61,2827.37) U2.3@3261.82,2803.58
NetC3_1: C3.1 R5.1 U3.3 | length 270.2
  Bottom Layer w15: U3.3 cw(c3815.31,2883.97) 3780.38,2883.97 C3.1 3792.4,2991.93 cw(c3863.11,2921.22) 3863.11,3021.22 R5.1 R5.1@3914.43,3021.22
NetC4_1: C4.1 R6.1 U4.3 | length 242.7
  Bottom Layer w30: U4.3 4194.97,2573.29 cw(c4265.68,2502.57) 4265.68,2602.57 R6.1
NetC5_1: C5.1 R10.1 U5.3 | length 276.9
  Bottom Layer w20: R10.1 C5.1 3048.48,1852.95 ccw(c3013.43,1888) U5.3
NetC6_1: C6.1 R11.1 U6.3 | length 254.5
  Bottom Layer w15: R11.1 3438.1,1378.3 ccw(c3367.39,1449.01) 3467.39,1449.01 U6.3
NetC7_1: C7.1 R15.1 U7.3 | length 280.2
  Bottom Layer w30: U7.3 3983.84,1683.27 cw(c3983.84,1583.27) 4054.55,1653.98 C7.1 R15.1
NetC8_1: C8.1 R16.1 U8.3 | length 287.5
  Bottom Layer w30: U8.3 cw(c4294.91,2054.75) 4294.91,2105.15 C8.1 R16.1
NetLED1_2: LED1.2 R3.2 | length 245.5
  Bottom Layer w20: LED1.2 R3.2
NetLED2_2: LED2.2 R4.2 | length 268.7
  Bottom Layer w15: LED2.2@3349,3226 R4.2@3439.29,2972.96
NetLED3_2: LED3.2 R7.2 | length 354.7
  Bottom Layer w10: LED3.2@4014,3203 4014,3128.42 ccw(c4114,3128.42) 4043.29,3057.71 cw(c4012.6,3027.02) 4056,3027.02 4056,2950.42 cw(c3956,2950.42) 4026.71,2879.71 R7.2
NetLED4_2: LED4.2 R8.2 | length 270.8
  Bottom Layer w20: R8.2 LED4.2
NetLED5_2: LED5.2 R12.2 | length 83.7
  Bottom Layer w15: LED5.2 3571,2727.68 ccw(c3582.99,2727.68) R12.2
NetLED6_2: LED6.2 R13.2 | length 247.2
  Bottom Layer w20: LED6.2 R13.2
NetLED7_2: LED7.2 R14.2 | length 206.8
  Bottom Layer w20: LED7.2 R14.2
NetLED8_2: LED8.2 R17.2 | length 219.8
  Bottom Layer w20: R17.2 LED8.2
NetLED9_2: LED9.2 R18.2 | length 225.6
  Bottom Layer w20: R18.2 LED9.2
OUT1: P1.1 R3.1 U1.1 | length 258.2
  Bottom Layer w15: P1.1 R3.1 U1.1
OUT2: P1.10 R4.1 U2.1 | length 548.7
  Top Layer w20: v1(3182,2948) 3351.23,2948 cw(c3351.24,2848) 3421.95,2918.71 U2.1
  Bottom Layer w20: P1.10 3158.71,2957.65 ccw(c3182,2980.94) v1(3182,2948) ; U2.1 3519,2918.88 ccw(c3448.29,2989.59) 3548.29,2989.59 R4.1
OUT3: P1.9 R7.1 U3.1 | length 1215.9
  Bottom Layer w15: P1.9 3254,2734 3304.71,2683.29 ccw(c3375.42,2754) 3375.42,2654 3805.23,2654 ccw(c3805.23,2754) 3875.95,2683.29 U3.1 4005.9,2782.73 ccw(c4005.9,2882.73) 4076.61,2812.02 R7.1
OUT4: P1.8 R8.1 U4.1 | length 1594.2
  Bottom Layer w15: P1.8 3209,2742 3315.71,2635.29 ccw(c3386.42,2706) 3386.42,2606 3942.58,2606 cw(c3942.58,2506) 4013.29,2576.71 4185.71,2404.29 ccw(c4256.42,2475) 4256.42,2375 U4.1 4307.29,2325.71 ccw(c4378,2396.43) 4378,2296.43 R8.1
OUT5: P1.2 R13.1 U5.1 | length 1054.4
  Bottom Layer w15: R13.1 2917.96,2101.15 cw(c2917.96,2004.28) U5.1 3134.71,2221.02 ccw(c3064,2291.73) 3164,2291.73 3164,2534.43 ccw(c3064,2534.43) 3134.71,2605.14 3115,2624.85 P1.2
OUT6: P1.3 R14.1 U6.1 | length 1446.4
  Bottom Layer w15: P1.3 3140.76,2652.76 3253.32,2540.2 cw(c3182.61,2469.49) 3282.61,2469.49 U6.1 3275.1,1675.27 ccw(c3275.1,1575.27) 3204.39,1645.98 R14.1
OUT7: P1.4 R17.1 U7.1 | length 1726
  Bottom Layer w15: P1.4 3189,2662 3363.71,2487.29 cw(c3293,2416.58) 3393,2416.58 3393,2042.77 ccw(c3493,2042.77) 3422.29,1972.05 U7.1 ccw(c3823.25,1571.09) 3772.85,1571.09 R17.1
OUT8: P1.6 R18.1 U8.1 | length 1747.3
  Bottom Layer w15: P1.6 3421.36,2472.29 ccw(c3492.07,2543) 3492.07,2443 3643.58,2443 cw(c3643.58,2343) 3714.29,2413.71 4154.69,1973.31 cw(c4086.99,1905.61) U8.1 ; U8.1@4182.83,1901.3 ccw(c4281.56,1905.61) 4211.68,1835.73 R18.1
VCC: LED1.1 LED2.1 LED3.1 LED4.1 LED6.1 LED7.1 LED8.1 LED9.1 P1.7 R1.2 R2.2 R5.2 R6.2 R10.2 R11.2 R15.2 R16.2 | length 8922.1
  Bottom Layer w15: 2556.67,2595.1 LED1.1 R1.2 ; 2633.7,1701.58 2635.7,1702.63 LED6.1 R10.2 ; 3267.79,1178.39 LED7.1 R11.2 ; 3338.2,3367.4 ccw(c3338.2,3322.01) 3306.11,3354.11 3269,3317 ccw(c3327.88,3258.12) 3244.61,3258.12 LED2.1 R2.2 ; 3975.78,3348.33 LED3.1 R5.2 ; R15.2 LED8.1 4112.55,1240.9 ; R6.2 LED4.1 4673.23,2589.41 ; R16.2 LED9.1 4668.26,1873.91
  Bottom Layer w20: P1.7 2879.24,3078.58 ccw(c3614,2239) 2556.67,2595.1 ccw(c3614,2239) 2544,2554.99 ccw(c3614,2239) 2635.7,1702.63 ccw(c3614,2239) 3267.79,1178.39 ccw(c3614,2239) 4112.55,1240.9 ccw(c3614,2239) 4668.26,1873.91 ccw(c3614,2239) 4673.23,2589.41 ccw(c3614,2239) 4604.96,2751.6 4559.29,2797.27 cw(c4630,2867.98) 4530,2867.98 4530,2930.58 ccw(c4430,2930.58) 4500.71,3001.29 4477,3025 ; 3325.32,3367.16 cw(c3618,2233) 3975.78,3348.33 cw(c3618,2233) 4479.15,3026.98
VSS: LED5.1 P2.6 P2.7 总开关1.2 电机开关1.2 | length 1482
  Top Layer w70: 电机开关1.2 4173.11,3217.89 v1@4415,2976
  Bottom Layer w10: LED5.1@3672,2786 3672,3220.75 ccw(c3665.05,3220.75) 3671.99,3221.11
  Bottom Layer w50: 总开关1.2@3474,3227 总开关1.2@3481.04,3226.95 ; 电机开关1.2@3764.05,3225.03 电机开关1.2@3768,3225
  Bottom Layer w70: 总开关1.2 3671.99,3221.11 3760.11,3221.11 电机开关1.2@3764.03,3225.03
  other v1: 4324,2888 4357,2920 4391,2952 4424,2985 4388,3010 4355,3038
pads on no net: P1.0 P2.0@4115.05,3129.2 总开关1.3 电机开关1.3
copper on no net: | length 0.8
  Top Layer w0.4: 3546.8,2583 3547.6,2583

## Polygon pours and split planes (outlines as drawn)
no net on Keep-Out Layer "Top Layer-No Net" (none): 3462.52,2234 ccw(c3620,2234) 3620,2076.52 ccw(c3620,2234) 3777.48,2234 ccw(c3620,2234) 3620,2391.48 ccw(c3620,2234)
GND on Top Layer "Top Layer-No Net" (solid, pour order 74): 4469,2967 cw(c4469,2962.17) 4472.41,2965.59 4509,2929 cw(c4501.76,2921.76) 4512,2921.76 4512,2833 ccw(c4533.73,2833) 4518.36,2817.64 4590,2746 4477.29,2633.29 cw(c4406.58,2704) 4406.58,2604 4178,2604 4178,2661.86 cw(c4212.14,2661.86) 4188,2686
M_6V on Top Layer "Top Layer-No Net" (solid, pour order 68): 4261,2893 4158,2790 4157,2790 4154,2790 4109,2835 4165,2891 4172,2891 4172,2893 4297,3018 4342,2973 4342,2972
VSS on Top Layer "Top Layer-No Net" (solid, pour order 58): 4272,2793 4457,2978 4457,2980 4457,2983 4410,3030 4225,2845 4225,2836
AGND on Top Layer "Top Layer-No Net" (solid, pour order 36): 2979,2928 2920,2872 2843,2951 2902,3006
IN_6V on Top Layer "Top Layer-No Net" (solid, pour order 52): 4160,2904 4088,2976 4205,3092 4277,3021
GND on Bottom Layer "Top Layer-No Net" (solid, pour order 72): 4150,2709 4210,2709 4292,2791 4469,2968 4470,2968 4532,2906 4532,2889 4532,2819 4597,2754 4467.29,2624.29 cw(c4396.58,2695) 4396.58,2595 4180,2595
M_6V on Bottom Layer "Top Layer-No Net" (solid, pour order 66): 4187,2822 4192,2822 4341,2971 4298,3014 4298,3017 4297,3017 4148,2868
VSS on Bottom Layer "Top Layer-No Net" (solid, pour order 62): 4374,2971 4422,3019 4357,3084 4308,3035 4308,3033
VSS on Bottom Layer "Top Layer-No Net" (solid, pour order 60): 4272,2793 4270,2793 4225,2838 4413,3026 4414,3026 4415,3026 4460,2981
AGND on Bottom Layer "Top Layer-No Net" (solid, pour order 38): 2920,2872 2978,2927 2977,2930 2902,3006 2843,2951
IN_6V on Bottom Layer "Top Layer-No Net" (solid, pour order 50): 4088,2976 4160,2904 4271,3015 4277,3021 4205,3092

## Keep-outs
Keep-Out Layer:
  circle w10: c3623,2242 r1192.1
  pour cut-out: 3462.52,2234 ccw(c3620,2234) 3620,2076.52 ccw(c3620,2234) 3777.48,2234 ccw(c3620,2234) 3620,2391.48 ccw(c3620,2234)
  lines w7: 3760.03,2161.94 ccw(c3620,2234) 3777.48,2234

## Other copper
Bottom Layer:
  rectangle net GND: 4314,2778 4334.1,2802
  rectangle net GND: 4280,2698 4334.1,2778
  rectangle net GND: 4334.1,2698 4424,2833.1
  rectangle net M_6V: 4154,2813 4215,2881
  rectangle net M_6V: 4166,2852 4220,2892
  rectangle net M_6V: 4187,2881 4243,2906
  rectangle net M_6V: 4220.74,2904.49 4262.72,2932.33
  rectangle net VSS: 4241,2817 4253,2829
  rectangle net VSS: 4257.68,2826.54 4296.13,2850.84
  rectangle net VSS: 4251,2808 4285,2846
  rectangle net VSS: 4274,2844.1 4323.1,2882
  rectangle net IN_6V: 4137.22,2959 4200,3015.84

## Silkscreen, mask and mechanical layers (free items; w line width, h text height)
Top Overlay:
  lines w10: 2425,2235 4818,2235 ; 2778.5,3076.5 3620,2235 ; 2788.5,1403.5 3620,2235 ; 3620,1068 3620,2235 ; 3620,3434 3620,2235 ; 4459,1396 3620,2235 ; 4472,3087 3620,2235
  text "③" at 3969,3287 h78.74 r337.5
  text "②" at 3313,3282 h78.74 r22.5
  text "Power" at 3929,3111 h100 r90
  text "Motor" at 3356,3101 h100 r90
  text "①" at 2571,2576 h78.74 r67.5
  text "④" at 4670,2508 h78.74 r292.5
  text "⑤" at 4629,1874 h78.74 r247.5
  text "⑧" at 2666,1732 h78.74 r112.5
  text "⑥" at 4084,1282 h78.74 r202.5
  text "⑦" at 3262,1266 h78.74 r157.5
Bottom Overlay:
  lines w10: 2441,2235 4816,2235 ; 2778.5,3076.5 4453.5,1401.5 ; 2786.5,1401.5 4470,3085 ; 3620,1052 3620,3429
  text "Power" at 3890,3332 h100 r90
  text "③" at 3969,3287 h78.74 r337.5
  text "②" at 3313,3282 h78.74 r22.5
  text "Motor" at 3408,3113 h100 r90
  text "IN_6V" at 4076,2976 h60 r135
  text "2 3 4 vcc 5 gnd 6 7 8 1" at 3470,2759 h60 r225
  text "VSS" at 4244,2757 h60 r315
  text "GND" at 4305,2755 h60 r135
  text "①" at 2571,2576 h78.74 r67.5
  text "④" at 4669.73,2508.39 h78.74 r292.5
  text "⑤" at 4629,1874 h78.74 r247.5
  text "⑧" at 2638,1799 h78.74 r112.5
  text "⑥" at 4084,1282 h78.74 r202.5
  text "⑦" at 3262,1266 h78.74 r157.5

## Text inside footprints (layer, text, board x,y; h text height)
LOGO2: Top Layer "集" at 4552.9,2185.64 h30; Top Layer "大" at 4657.9,2185.64 h30; Top Layer "电" at 4584.9,2150.64 h30; Top Layer "协" at 4621.9,2150.64 h30; Top Solder "协" at 4621.9,2150.64 h30; Top Solder "电" at 4584.9,2150.64 h30; Top Solder "大" at 4657.9,2185.64 h30; Top Solder "集" at 4552.9,2185.64 h30